# Altium PCB Main.PcbDoc
Units mil, origin at the board's own origin, x right, y up, seen from the top; angles counter-clockwise.
Board outline 930 x 545 mil, 2 copper layers (Top Layer, Bottom Layer); 2 components, 16 nets, 32 pads, 16 vias.
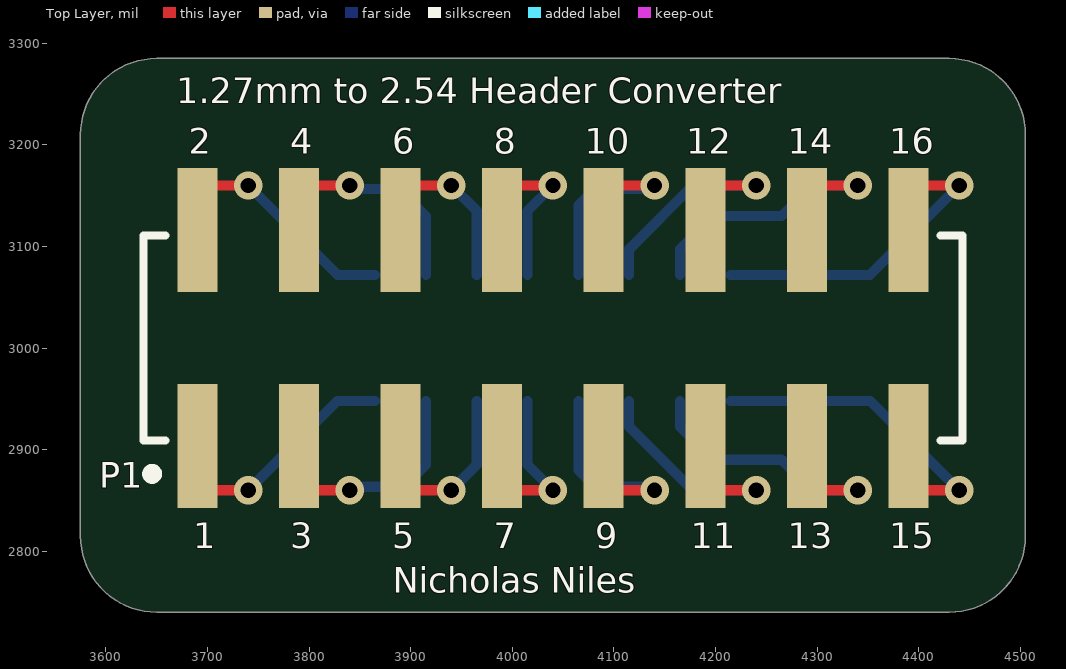
[diagram p0: Top Layer view]
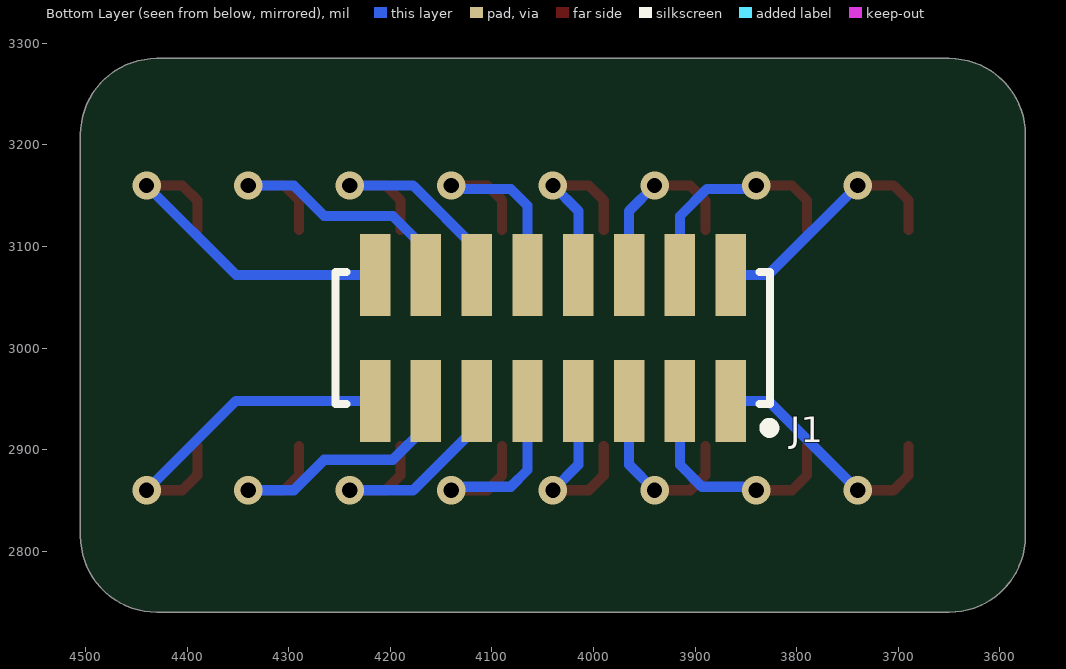
[diagram p1: Bottom Layer view, seen from below]

## Layer stack, top to bottom
Top Solder: solder mask 0.4, Solder Resist, Dk 3.5
Top Layer: signal copper 1.4
Dielectric 1: dielectric 12.6, FR-4, Dk 4.8
Bottom Layer: signal copper 1.4
Bottom Solder: solder mask 0.4, Solder Resist, Dk 3.5

## Board outline
3575,2815 3575,3210 cw(c3650,3210) 3650,3285 4430,3285 cw(c4430,3210) 4505,3210 4505,2815 cw(c4430,2815) 4430,2740 3650,2740 cw(c3650,2815)

## Design rules (kind name [scope] priority, off if disabled: settings)
BoardOutlineClearance [All] p1: gap=7.87 ignorepadtopadclearanceinfootprint=FALSE
Clearance [All] p1: gap=5 ignorepadtopadclearanceinfootprint=TRUE except(10: Arc-Hole Track-Hole SMDPad-Hole THPad-Hole Via-Hole Fill-Hole Poly-Hole Region-Hole Text-Hole)
ComponentClearance [All] p1: gap=5 collisioncheckmode=3 verticalgap=5 showdistances=TRUE
DiffPairsRouting [All] p1: maxlimit=10 minlimit=5 mostfreqgap=5 toplayer_minwidth=5 toplayer_maxwidth=1000 toplayer_prefwidth=5 bottomlayer_minwidth=5 bottomlayer_maxwidth=1000 bottomlayer_prefwidth=5 maxuncoupledlength=500
Height [All] p1: minheight=0 maxheight=71497.94 prefheight=500
HoleSize [All] p1: absolutevalues=TRUE maxlimit=248.03 minlimit=11.81 maxpercent=80.000 minpercent=20.000
HoleToHoleClearance [All] p1: gap=10 allowstackedmicrovias=FALSE
MinimumAnnularRing [All] p1: minimumring=6
MinimumSolderMaskSliver [All] p1: minsoldermaskwidth=6
PlaneClearance [All] p1: clearance=5
PlaneConnect PlaneConnectPowerPads [InPadClass('PowerPads')] p1: planeconnectstyle=Direct reliefexpansion=20 reliefentries=4 reliefconductorwidth=10 reliefairgap=10
PlaneConnect [All] p2: pad.planeconnectstyle=Relief pad.reliefexpansion=11.81 pad.reliefentries=4 pad.reliefconductorwidth=5 pad.reliefairgap=5 via.planeconnectstyle=Direct via.reliefexpansion=11.81 via.reliefentries=4 via.reliefconductorwidth=5 via.reliefairgap=5
PolygonConnect PolygonConnectPowerPads [All vs (InPadClass('PowerPads'))] p1: connectstyle=Direct reliefconductorwidth=10 reliefentries=4 polygonreliefangle="90 Angle" airgapwidth=10
PolygonConnect [All] p2: thpad.connectstyle=Relief thpad.reliefconductorwidth=5 thpad.reliefentries=4 thpad.polygonreliefangle="90 Angle" thpad.airgapwidth=5 smdpad.connectstyle=Relief smdpad.reliefconductorwidth=5 smdpad.reliefentries=4 smdpad.polygonreliefangle="90 Angle" smdpad.airgapwidth=5 via.connectstyle=Direct via.reliefconductorwidth=5 via.reliefentries=4 via.polygonreliefangle="90 Angle" via.airgapwidth=5
RoutingVias [All] p1: holewidth=11.81 width=23.62 viastyle="Through Hole" minholewidth=11.81 minwidth=23.62 maxholewidth=23.62 maxwidth=259.84
SilkToSilkClearance [All] p1: silktosilkclearance=5
SilkToSolderMaskClearance [IsPad] p1: minsilkscreentomaskgap=5 clearancetoexposedcopper=TRUE
SolderMaskExpansion [All] p1: expansion=2 istentingtop=FALSE
UnRoutedNet [All] p1: checkbadconnections=TRUE
Width Width_10mil [All] p1: maxlimit=1000 minlimit=10 preferedwidth=10 minimp=50.000000 maximp=50.000000 favimp=50.000000
Width Width_6mil [All] p2: maxlimit=1000 minlimit=6 preferedwidth=6 minimp=50.000000 maximp=50.000000 favimp=50.000000
Width Power_20mil [All] p3: maxlimit=1000 minlimit=20 preferedwidth=20 minimp=50.000000 maximp=50.000000 favimp=50.000000
Width Power_12mil [All] p4: maxlimit=1000 minlimit=12 preferedwidth=12 minimp=50.000000 maximp=50.000000 favimp=50.000000
Width Width_5mil [All] p5: maxlimit=1000 minlimit=5 preferedwidth=5 minimp=50.000000 maximp=50.000000 favimp=50.000000
19 further rules are at their usual default settings.

## Components (designator, comment, footprint, x,y, rotation, side; value= is the part's Value field where it differs from the comment)
J1 "62301621021" 62301621021 4040,3010 r180 bottom locked
P1 "61001621121" 61001621121 4040,3010 r0 top locked

## Footprints (in the part's own frame and the unit in brackets; to place one, negate y for a bottom-side part, rotate by r counter-clockwise, add the part's x,y. Pads: shape width x height; smd on the part's side, far side on the other; paste and mask are expansions set on the pad)
61001621121 [mm] "Pin Header, pitch 2.54 mm, SMD, Vertical, dual row, 16p"
  rect 1x3.1 smd: 1(-8.89,-2.7) 2(-8.89,2.7) 3(-6.35,-2.7) 4(-6.35,2.7) 5(-3.81,-2.7) 6(-3.81,2.7) 7(-1.27,-2.7) 8(-1.27,2.7) 9(1.27,-2.7) 10(1.27,2.7) 11(3.81,-2.7) 12(3.81,2.7) 13(6.35,-2.7) 14(6.35,2.7) 15(8.89,-2.7) 16(8.89,2.7)
  silkscreen extent -10.24,-3.52 10.24,2.57, body extent -10.16,-3.75 10.16,3.75, height 9.62
62301621021 [mm] "Socket Header, Pitch 1.27 mm, SMT, Vertical, dual row, 16p"
  rect 0.76x2.05 smd: 1(4.445,-1.575) 2(4.445,1.575) 3(3.175,-1.575) 4(3.175,1.575) 5(1.905,-1.575) 6(1.905,1.575) 7(0.635,-1.575) 8(0.635,1.575) 9(-0.635,-1.575) 10(-0.635,1.575) 11(-1.905,-1.575) 12(-1.905,1.575) 13(-3.175,-1.575) 14(-3.175,1.575) 15(-4.445,-1.575) 16(-4.445,1.575)
  silkscreen extent -5.43,-2.37 5.53,1.65, body extent -5.28,-2.3 5.28,2.3, height 4.6

## Part data
J1: library part CMP-1502-01190-4, "SMT Vertical Socket Header WR-PHD, Pitch 1.27 mm, Dual Row, 16 pins", Contact Resistance=20mΩ, Current Rating=1A, Operating Supply Voltage=250V, Gender=Female, Lead Pitch=1.27mm, Number of Pins=16, Orientation=Vertical
P1: library part CMP-1502-01034-4, "SMT Vertical Pin Header WR-PHD, Pitch 2.54 mm, Dual Row, 16 pins", Color=Black, Contact Resistance=20mΩ, Current Rating=3A, Max Operating Temperature=105°C, Min Operating Temperature=-40°C, Operating Supply Voltage=250V, Connector Type="Male Pin", Contact Material=Gold, Contact Mating Length=5.9944mm, Contact Plating=Gold, Gender=Male, Height=10mm, Lead Pitch=2.54mm, Mount="Surface Mount", Number of Contacts=16, Number of Pins=16, Number of Positions=16, Number of Rows=2, Orientation=Vertical, Pitch=2.54mm, RoHS=Compliant, Row Spacing=2.54mm, Termination=Solder, Voltage Rating=250V

## Via types
v1: diameter 28, hole 15, Top Layer to Bottom Layer, tented both sides, 16 vias

## Nets (pads, with @x,y where several pads share a name; then routed paths per layer and width w, separated by ;. In a path a pad name is that pad's centre, name@x,y a point inside that pad or via, vN(x,y) a via of type N, cw(c..) or ccw(c..) an arc to the next point about the centre after c; other vN are vias at no path point)
NetJ1_1: J1.1 P1.1 | length 246.5
  Top Layer w10: P1.1 3690,2874.69 3704.69,2860 v1(3740,2860)
  Bottom Layer w10: v1(3740,2860) 3827.99,2947.99 J1.1
NetJ1_2: J1.2 P1.2 | length 246.5
  Top Layer w10: P1.2 3690,3145.31 3704.69,3160 v1(3740,3160)
  Bottom Layer w10: v1(3740,3160) 3827.99,3072.01 J1.2
NetJ1_3: J1.3 P1.3 | length 233.4
  Top Layer w10: P1.3 3790,2874.69 3804.69,2860 v1(3840,2860)
  Bottom Layer w10: v1(3840,2860) 3843.44,2863.44 3893.44,2863.44 3915,2885 J1.3
NetJ1_4: J1.4 P1.4 | length 230.5
  Top Layer w10: P1.4 3790,3145.31 3804.69,3160 v1(3840,3160)
  Bottom Layer w10: v1(3840,3160) 3843.44,3156.56 3888.44,3156.56 3915,3130 J1.4
NetJ1_5: J1.5 P1.5 | length 183.4
  Top Layer w10: P1.5 3890,2874.69 3904.69,2860 v1(3940,2860)
  Bottom Layer w10: v1(3940,2860) 3965,2885 J1.5
NetJ1_6: J1.6 P1.6 | length 183.4
  Top Layer w10: P1.6 3890,3145.31 3904.69,3160 v1(3940,3160)
  Bottom Layer w10: v1(3940,3160) 3965,3135 J1.6
NetJ1_7: J1.7 P1.7 | length 183.4
  Top Layer w10: P1.7 3990,2874.69 4004.69,2860 v1(4040,2860)
  Bottom Layer w10: J1.7 4015,2885 v1(4040,2860)
NetJ1_8: J1.8 P1.8 | length 183.4
  Top Layer w10: P1.8 3990,3145.31 4004.69,3160 v1(4040,3160)
  Bottom Layer w10: J1.8 4015,3135 v1(4040,3160)
NetJ1_9: J1.9 P1.9 | length 236.4
  Top Layer w10: P1.9 4090,2874.69 4104.69,2860 v1(4140,2860)
  Bottom Layer w10: J1.9 4065,2880 4081.56,2863.44 4136.56,2863.44 v1(4140,2860)
NetJ1_10: J1.10 P1.10 | length 236.4
  Top Layer w10: P1.10 4090,3145.31 4104.69,3160 v1(4140,3160)
  Bottom Layer w10: J1.10 4065,3140 4081.56,3156.56 4136.56,3156.56 v1(4140,3160)
NetJ1_11: J1.11 P1.11 | length 261.4
  Top Layer w10: P1.11 4190,2874.69 4204.69,2860 v1(4240,2860)
  Bottom Layer w10: J1.11 4115,2922.6 4177.6,2860 v1(4240,2860)
NetJ1_12: J1.12 P1.12 | length 261.4
  Top Layer w10: P1.12 4190,3145.31 4204.69,3160 v1(4240,3160)
  Bottom Layer w10: J1.12 4115,3097.4 4177.6,3160 v1(4240,3160)
NetJ1_13: J1.13 P1.13 | length 311.4
  Top Layer w10: P1.13 4290,2874.69 4304.69,2860 v1(4340,2860)
  Bottom Layer w10: J1.13 4165,2922.6 4197.6,2890 4265.06,2890 4295.06,2860 v1(4340,2860)
NetJ1_14: J1.14 P1.14 | length 311.4
  Top Layer w10: P1.14 4290,3145.31 4304.69,3160 v1(4340,3160)
  Bottom Layer w10: J1.14 4165,3097.4 4197.6,3130 4265.06,3130 4295.06,3160 v1(4340,3160)
NetJ1_15: J1.15 P1.15 | length 346.5
  Top Layer w10: P1.15 4390,2874.69 4404.69,2860 v1(4440,2860)
  Bottom Layer w10: J1.15 4352.01,2947.99 v1(4440,2860)
NetJ1_16: J1.16 P1.16 | length 346.5
  Top Layer w10: P1.16 4390,3145.31 4404.69,3160 v1(4440,3160)
  Bottom Layer w10: J1.16 4352.01,3072.01 v1(4440,3160)

## Silkscreen, mask and mechanical layers (free items; w line width, h text height)
Top Overlay:
  text "1.27mm to 2.54 Header Converter" at 3669.29,3241 h25
  text "2" at 3681.67,3191 h25
  text "4" at 3781.67,3191 h25
  text "6" at 3881.67,3191 h25
  text "8" at 3981.67,3191 h25
  text "10" at 4071.26,3191 h25
  text "12" at 4171.26,3191 h25
  text "14" at 4271.26,3191 h25
  text "16" at 4371.26,3191 h25
  text "1" at 3685.83,2803 h25
  text "3" at 3781.67,2803 h25
  text "5" at 3881.67,2803 h25
  text "7" at 3981.67,2803 h25
  text "9" at 4081.67,2803 h25
  text "11" at 4175.42,2803 h25
  text "13" at 4271.26,2803 h25
  text "15" at 4371.26,2803 h25
  text "Nicholas Niles" at 3882.55,2759.01 h25
Mechanical 1:
  the board outline again, w10